# Altium PCB PowerBoardPCB.PcbDoc
Units mm, origin at the board's own origin, x right, y up, seen from the top; angles counter-clockwise.
Board outline 55 x 50 mm, 2 copper layers (Top Layer, Bottom Layer); 20 components, 22 nets, 92 pads, 1 vias.
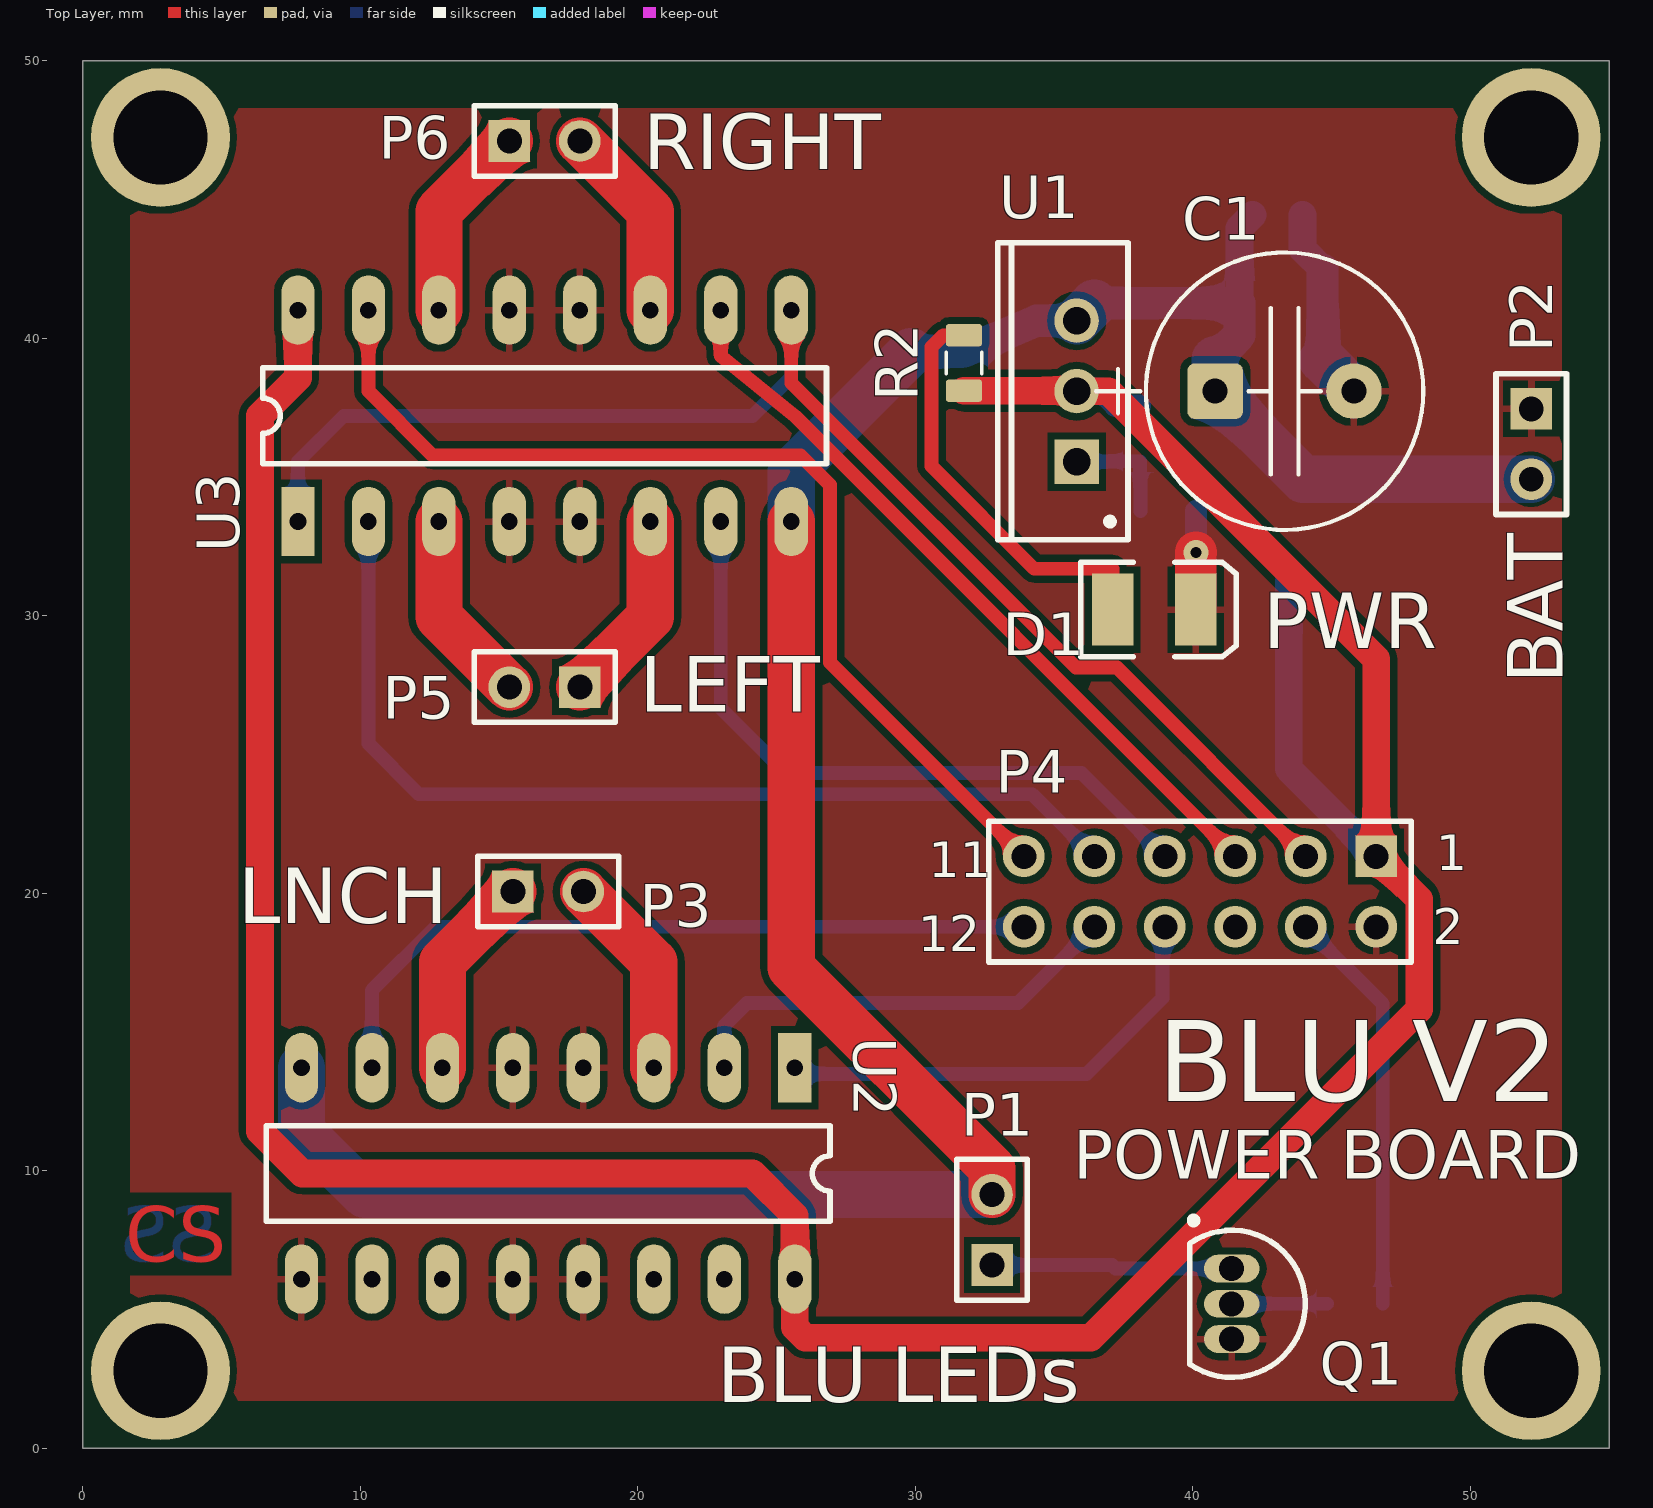
[diagram p0: Top Layer view]
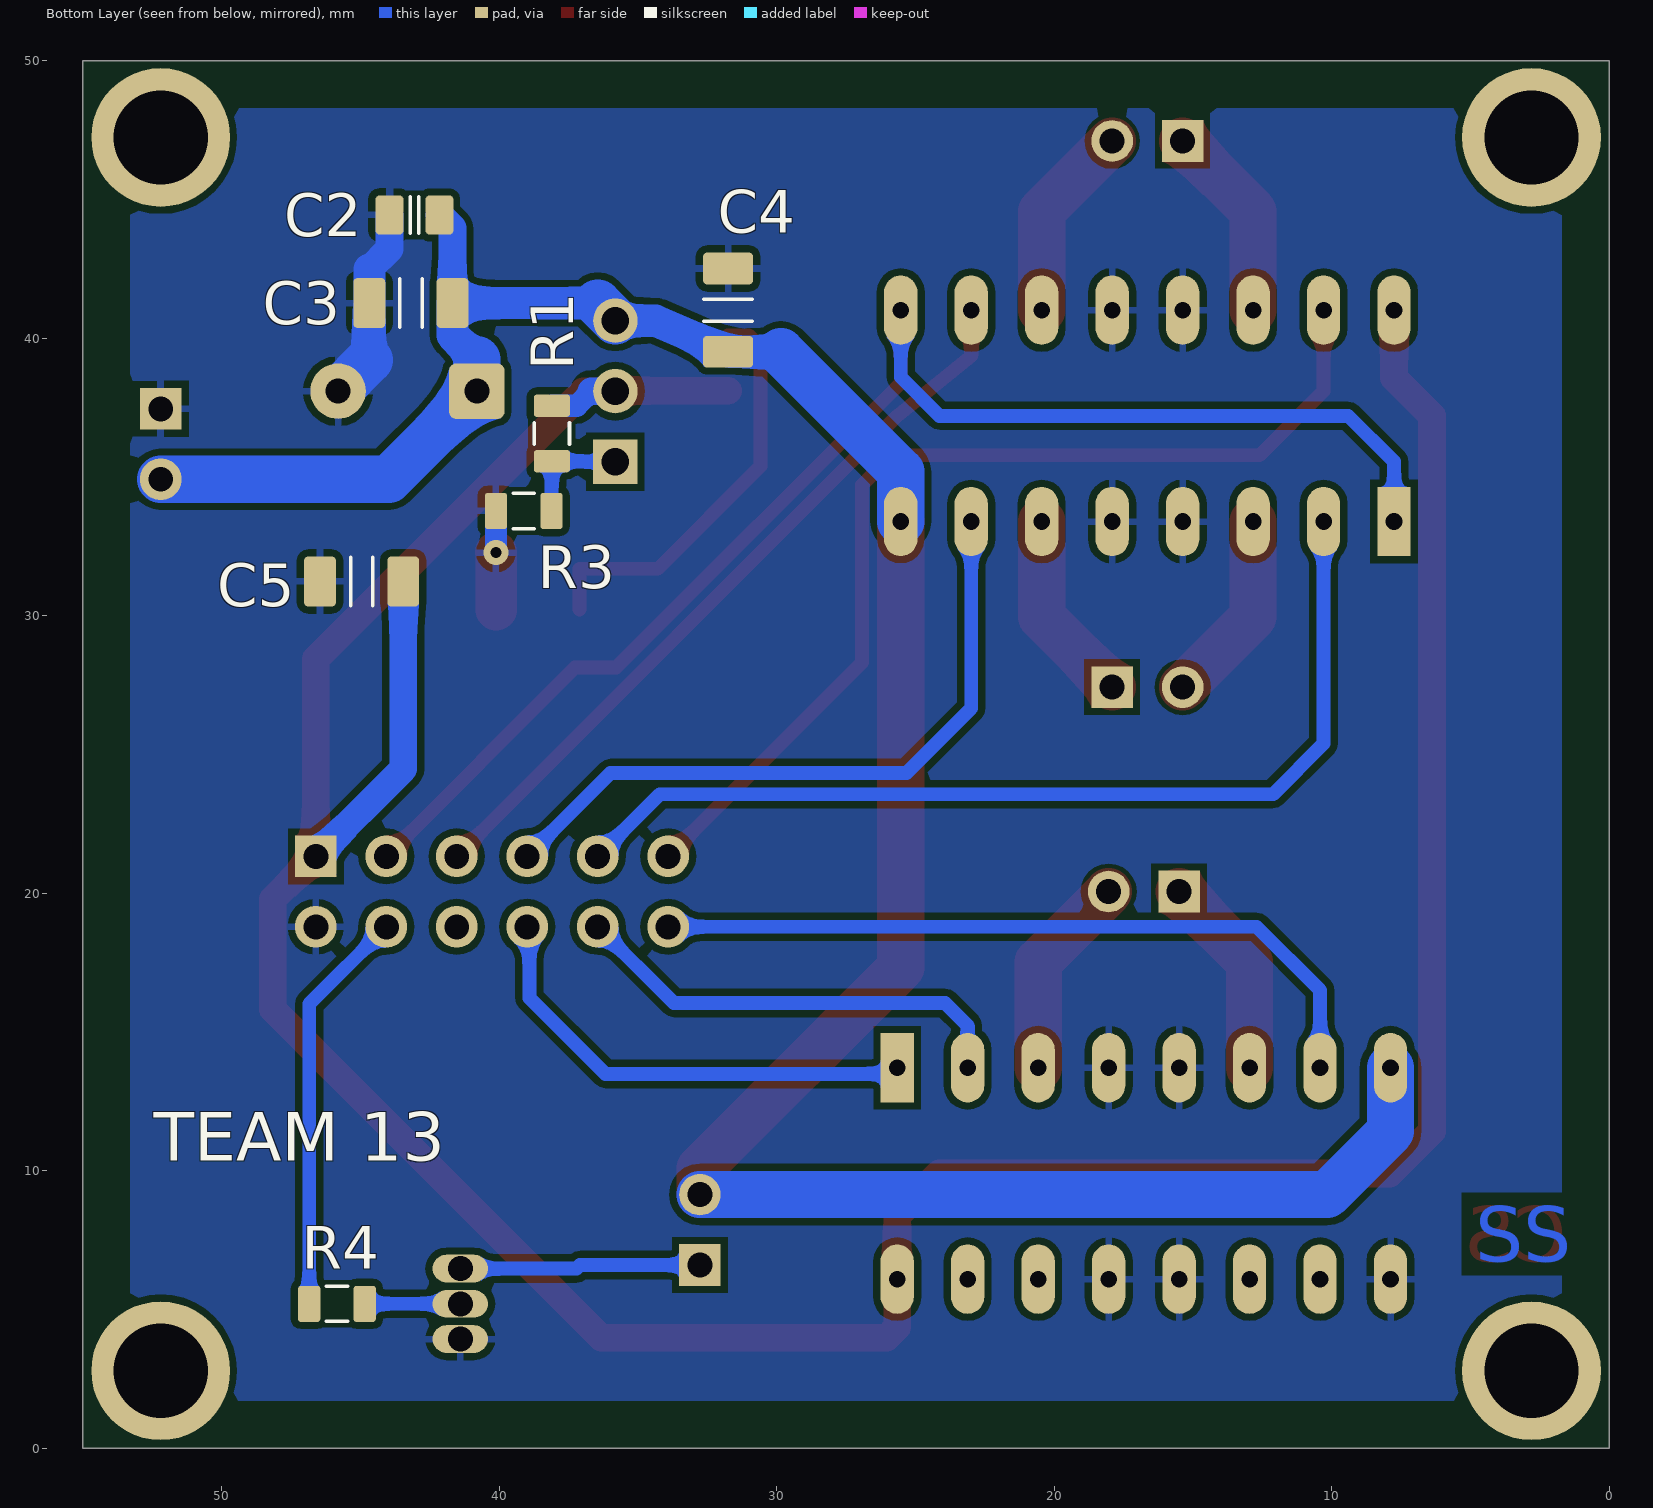
[diagram p1: Bottom Layer view, seen from below]

## Layer stack, top to bottom
Top Solder: solder mask 0.0102, Solder Resist, Dk 3.5
Top Layer: signal copper 0.0356
Dielectric 1: dielectric 0.32, FR-4, Dk 4.8
Bottom Layer: signal copper 0.0356
Bottom Solder: solder mask 0.0102, Solder Resist, Dk 3.5

## Board outline
0,0 55,0 55,50 0,50

## Design rules (kind name [scope] priority, off if disabled: settings)
Clearance [All] p1: gap=0.25
PolygonConnect [All] p1: connectstyle=Relief reliefconductorwidth=0.254 reliefentries=4 polygonreliefangle="90 Angle" airgapwidth=0.254
RoutingVias [All] p1: holewidth=0.4 width=0.9 viastyle="Through Hole" minholewidth=0.711 minwidth=1.27 maxholewidth=0.711 maxwidth=1.27
SMDNeckDown [All] p1: percent=100.000
SolderMaskExpansion [All] p1: expansion=0.102
Width Width_Motors [(InNet('NetP3_1') OR InNet('NetP3_2') OR InNet('NetP5_1') OR InNet('NetP5_2') OR InNet('NetP6_1') OR InNet('NetP6_2'))] p1: maxlimit=2 minlimit=1.5 preferedwidth=1.7 minimp=50.000000 maximp=50.000000 favimp=50.000000
Width Width_Power [(InNet('VBAT')OR InNet('GND'))] p2: maxlimit=2 minlimit=1.5 preferedwidth=1.7 minimp=50.000000 maximp=50.000000 favimp=50.000000
Width Width_5V [InNet('5VPB')] p3: maxlimit=1.5 minlimit=0.8 preferedwidth=1 minimp=50.000000 maximp=50.000000 favimp=50.000000
Width [All] p4: maxlimit=1.5 minlimit=0.3 preferedwidth=0.5 minimp=50.000000 maximp=50.000000 favimp=50.000000
30 further rules are at their usual default settings.

## Components (designator, comment, footprint, x,y, rotation, side; value= is the part's Value field where it differs from the comment)
C1 "1000µ" CAPE5.0mm 43.307,38.1 r0 top
C2 "approved sub OK" CAPC2012X135N 43.053,44.45 r0 bottom
C3 "approved sub OK" CAPC3216X180N 43.18,41.275 r0 bottom
C4 "approved sub OK" CAPC3216X180N 31.75,41.021 r90 bottom
C5 "approved sub OK" CAPC3216X180N 44.958,31.242 r0 bottom
D1 "PWRLED" 3.5X2.8X1.9 38.608,30.226 r0 top
P1 "BLU_LED_HEADER" HDR1X2 32.766,6.604 r90 top
P2 "V_BAT" HDR1X2 52.197,37.465 r270 top
P3 "LNCH_MOTOR_CONNECTOR" HDR1X2 15.494,20.066 r0 top
P4 "POWERBOARD_HEADER" HDR2X6 46.609,21.336 r180 top
P5 "LEFT_MOTOR_CONNECTOR" HDR1X2 17.907,27.432 r180 top
P6 "RIGHT_MOTOR_CONNECTOR" HDR1X2 15.367,47.117 r0 top
Q1 "NPN" TO-226-AA 41.402,5.207 r180 top
R1 "3K9" RESC2012X70N 38.1,36.576 r270 bottom
R2 "330" RESC2012X70N 31.75,39.116 r90 top
R3 "10K" RESC2012X70N 39.116,33.782 r0 bottom
R4 "10K" RESC2012N_ZERO 45.847,5.207 r0 bottom
U1 "LM317AT/NOPB" T03B 35.814,38.1 r90 top
U2 "L293DNE Motor Driver" "DIP16 (NE)" 25.654,13.716 r270 top
U3 "L293DNE Motor Driver" "DIP16 (NE)" 7.747,33.401 r90 top

## Footprints (in the part's own frame and the unit in brackets; to place one, negate y for a bottom-side part, rotate by r counter-clockwise, add the part's x,y. Pads: shape width x height; smd on the part's side, far side on the other; paste and mask are expansions set on the pad)
3.5X2.8X1.9 [mm] "SM LED; 2 C-Bend Leads; Body 3.5 x 2.8 x 1.9 mm, inc leads (LxWxH typ)"
  rect 1.5x2.6 smd: 1(-1.5,0) 2(1.5,0)
  silkscreen extent -2.65,-1.7 2.95,1.7
CAPC2012X135N [mm] "Chip Capacitor, Body 2.0x1.2mm, EIA 0805, IPC Medium Density"
  round 0.254 on Mech15: 0(0,0)
  rrect25% 1x1.4 smd: 1(-0.9,0) 2(0.9,0)
  Top Layer pour cut-out: -0.675,0.7 -0.475,0.9 0.475,0.9 0.675,0.7 0.675,-0.7 0.475,-0.9 -0.475,-0.9 -0.675,-0.7
  silkscreen extent -0.15,-0.65 0.15,0.65, body extent -1.1,-0.72 1.1,0.73, height 1.34
CAPC3216X180N [mm] "Chip Capacitor, Body 3.2x1.6mm, 1.8mm H, EIA 1206, IPC Medium Density"
  round 0.508 on Mech15: 0(0,0)
  rrect25% 1.15x1.8 smd: 1(-1.5,0) 2(1.5,0)
  silkscreen extent -0.4,-0.88 0.4,0.88, body extent -1.7,-0.9 1.7,0.9, height 1.8
CAPE5.0mm [mm]
  rrect25% 2x2 hole 0.9: 1(-2.5,0)
  round 2 hole 0.9: 2(2.5,0)
  silkscreen extent -6.8,-5 5,5, body extent -4.96,-4.97 4.95,4.96, height 20
"DIP16 (NE)" [mm]
  rect 2.5x1.2 hole 0.6: 1(0,0)
  oval 2.5x1.2 hole 0.6: 2(0,-2.54) 3(0,-5.08) 4(0,-7.62) 5(0,-10.16) 6(0,-12.7) 7(0,-15.24) 8(0,-17.78) 9(7.62,-17.78) 10(7.62,-15.24) 11(7.62,-12.7) 12(7.62,-10.16) 13(7.62,-7.62) 14(7.62,-5.08) 15(7.62,-2.54) 16(7.62,0)
  silkscreen extent 2.08,-19.05 5.54,1.27
HDR1X2 [mm] "Connector; Header; 2 Position"
  rect 1.5x1.5 hole 0.9: 1(0,0)
  round 1.5 hole 0.9: 2(2.54,0)
  silkscreen extent -1.27,-1.27 3.81,1.27
HDR2X6 [mm] "Connector; Header; 6x2 Position"
  rect 1.5x1.5 hole 0.9: 1(0,0)
  round 1.5 hole 0.9: 2(0,2.54) 3(2.54,0) 4(2.54,2.54) 5(5.08,0) 6(5.08,2.54) 7(7.62,0) 8(7.62,2.54) 9(10.16,0) 10(10.16,2.54) 11(12.7,0) 12(12.7,2.54)
  silkscreen extent -1.27,-1.27 13.97,3.81
RESC2012N_ZERO [mm] "Chip Resistor, Body 2.0x1.2mm, 0805, IPC Medium Density"
  round 0.254 on Mech15: 0(0,0)
  rrect25% 0.8x1.3 smd: 1(-1,0) 2(1,0)
  Top Layer pour cut-out: -0.725,0.65 -0.525,0.85 0.525,0.85 0.725,0.65 0.725,-0.65 0.525,-0.85 -0.525,-0.85 -0.725,-0.65
  silkscreen extent -0.38,-0.64 0.38,0.64, body extent -1.1,-0.67 1.1,0.68, height 0.69
RESC2012X70N [mm] "Chip Resistor, Body 2.0x1.2mm, EIA 0805, IPC Medium Density"
  round 0.254 on Mech15: 0(0,0)
  rrect25% 0.8x1.3 smd: 1(-1,0) 2(1,0)
  Top Layer pour cut-out: -0.725,0.65 -0.525,0.85 0.525,0.85 0.725,0.65 0.725,-0.65 0.525,-0.85 -0.525,-0.85 -0.725,-0.65
  silkscreen extent -0.38,-0.64 0.38,0.64, body extent -1.1,-0.67 1.1,0.68, height 0.69
T03B [mm] "TO, Thru-Hole, Vertical, Heatsink Mounted; 3 In-Line Leads; Pitch 2.54 mm"
  rect 1.6x1.6 hole 1: 1(-2.54,0)
  round 1.6 hole 1: 2(0,0) 3(2.54,0)
  silkscreen extent -5.35,-1.85 5.35,2.85, body extent -5.4,-1.9 5.4,2.9, height 19.8
TO-226-AA [mm] "TO, Flat Index; 3 In-Line, Axial Leads; Body Dia. 4.8mm; Leads 0.55 x 0.51 mm (max)"
  oval 2x1 hole 0.9: 1(0,-1.27) 2(0,0) 3(0,1.27)
  silkscreen extent -2.65,-3.13 1.52,2.65, body extent -2.66,-2.66 1.52,2.66, height 5.33

## Part data
C1: library part CAPE_33u_200V_THT, "Capacitor THT Alum Elec 33uF 20% 200V"
C2: library part CAPC_1n8_50V_0805, "Capacitor SMD Cer 1.8nF 10% 50V X7R 0805"
C3 C4 C5: library part CAPC_10u_1206_16V, "Capacitor SMD Cer 10uF 10% 16V X7R 1206"
D1: library part LED3, "Typical BLUE SiC LED"
P1 P2 P3 P5 P6: library part "Header 2", "Header, 2-Pin"
P4: library part "Header 6X2", "Header, 6-Pin, Dual row"
Q1: "NPN Bipolar Transistor"
R1 R2 R3: library part RES_10K_0805_5%, "Resistor SMD chip 10k Ohm 0.125W 5% 0805"
R4: library part RES_0R_0805, "Resistor SMD chip 0.0 Ohm 0.125W 0805"
U1: library part CMP-0062-02452-1, "3-Terminal Adjustable Regulator, 3-pin TO-220, Pb-Free"
U2 U3: library part L293DNE, "TI L293DNE Quad H-bridge Motor Driver"

## Free pads (board coordinates)
  round 5 hole 3.4: 0(2.794,2.794) 0(2.794,47.244) 0(52.197,2.794) 0(52.197,47.244)

## Via types
v1: diameter 0.9, hole 0.4, Top Layer to Bottom Layer, 1 vias

## Nets (pads, with @x,y where several pads share a name; then routed paths per layer and width w, separated by ;. In a path a pad name is that pad's centre, name@x,y a point inside that pad or via, vN(x,y) a via of type N, cw(c..) or ccw(c..) an arc to the next point about the centre after c; other vN are vias at no path point)
5VPB: C5.1 P4.1 R1.1 R2.1 U1.2 U2.16 U3.16 | length 128.1
  Top Layer w1: U3.16 7.747,38.583 6.375,37.211 6.375,11.43 7.899,9.906 24.13,9.906 25.654,8.382 U2.16 25.654,4.369 26.035,3.988 36.322,3.988 48.158,15.824 48.158,19.787 P4.1 46.609,28.448 36.957,38.1 U1.2 35.798,38.116 R2.1
  Bottom Layer w0.8: 36.678,38.1 37.202,37.576 R1.1
  Bottom Layer w1: U1.2 36.678,38.1 ; C5.1 43.458,24.487 P4.1
GND: C1.2 C2.2 C3.2 C4.2 C5.2 D1.2 P2.1 P4.2 Q1.3 R3.2 U2.4 U2.5 U2.9 U2.12 U2.13 U3.4 U3.5 U3.12 U3.13 | length 10.7
  Top Layer w1.5: D1.2 40.108,32.275 v1(40.116,32.283)
  Bottom Layer w0.8: v1(40.116,32.283) R3.2
  Bottom Layer w1: C2.2 43.953,43.221 44.68,42.494
  Bottom Layer w1.15: 44.68,39.227 C3.2 44.68,42.494
  Bottom Layer w1.7: 44.68,39.227 C1.2
LNCHEN: P4.8 U2.1 | length 17.3
  Bottom Layer w0.5: U2.1 25.654,13.492 36.175,13.492 38.913,16.231 38.913,18.796 P4.8
LNCHSIG_F: P4.10 U2.2 | length 16.3
  Bottom Layer w0.5: U2.2 23.114,15.24 23.927,16.053 33.706,16.053 P4.10
LNCHSIG_R: P4.12 U2.7 | length 27.2
  Bottom Layer w0.5: U2.7 10.414,16.51 12.7,18.796 P4.12
MTREN: P4.3 U3.1 U3.9 | length 51.8
  Top Layer w0.5: U3.9 25.527,38.399 35.783,28.143 37.262,28.143 P4.3
  Bottom Layer w0.5: U3.1 7.747,35.56 9.398,37.211 24.13,37.211 25.527,38.608 U3.9
MTRSIG_LF: P4.9 U3.2 | length 35.8
  Bottom Layer w0.5: U3.2 10.287,25.4 12.116,23.571 34.214,23.571 P4.9
MTRSIG_LR: P4.7 U3.7 | length 24.9
  Bottom Layer w0.5: U3.7 22.987,26.67 25.324,24.333 35.992,24.333 P4.7
MTRSIG_RF: P4.11 U3.15 | length 37.2
  Top Layer w0.5: U3.15 10.287,38.1 12.598,35.789 25.857,35.789 26.924,34.722 26.924,28.321 P4.11
MTRSIG_RR: P4.5 U3.10 | length 27.5
  Top Layer w0.5: U3.10 22.987,39.37 25.654,37.211 P4.5
NetD1_1: D1.1 R2.2 | length 15.2
  Top Layer w0.5: R2.2 31.01,40.116 30.582,39.688 30.582,35.401 34.283,31.699 37.108,31.699 D1.1
NetP1_1: P1.1 Q1.1 | length 8.7
  Bottom Layer w0.5: P1.1 37.084,6.604 37.211,6.477 Q1.1
NetP3_1: P3.1 U2.6 | length 7.4
  Top Layer w1.7: U2.6 12.954,17.526 P3.1
NetP3_2: P3.2 U2.3 | length 7.4
  Top Layer w1.7: P3.2 20.574,17.526 U2.3
NetP4_4: P4.4 R4.2 | length 14.7
  Bottom Layer w0.5: P4.4 46.847,16.018 R4.2
NetP5_1: P5.1 U3.6 | length 7
  Top Layer w1.7: P5.1 20.447,29.972 U3.6
NetP5_2: P5.2 U3.3 | length 7
  Top Layer w1.7: U3.3 12.827,29.972 P5.2
NetP6_1: P6.1 U3.14 | length 7.1
  Top Layer w1.7: U3.14 12.827,44.577 P6.1
NetP6_2: P6.2 U3.11 | length 7.1
  Top Layer w1.7: P6.2 20.447,44.577 U3.11
NetQ1_2: Q1.2 R4.1 | length 3.4
  Bottom Layer w0.5: Q1.2 R4.1
NetR1_2: R1.2 R3.1 U1.1 | length 4.1
  Bottom Layer w0.5: U1.1 36.932,35.56 36.948,35.576 R1.2 38.1,34.687 38.116,34.671 R3.1
VBAT: C1.1 C2.1 C3.1 C4.1 P1.2 P2.2 U1.3 U2.8 U3.8 | length 95.2
  Top Layer w1.7: U3.8 25.527,17.323 32.766,10.084 P1.2
  Bottom Layer w1: C3.1 41.68,43.977 C2.1
  Bottom Layer w1.15: 29.845,39.521 C4.1 34.368,40.64 U1.3 ; 36.449,41.275 C3.1 41.68,40.116 40.807,39.243
  Bottom Layer w1.7: U2.8 7.874,11.43 10.16,9.144 P1.2 ; U3.8 25.527,35.203 29.845,39.521 ; U1.3 36.449,41.275 ; 40.807,39.243 C1.1 43.982,34.925 P2.2
pads on no net: C2.0 C3.0 C4.0 C5.0 P4.6 R1.0 R2.0 R3.0 R4.0 U2.10 U2.11 U2.14 U2.15

## Polygon pours and split planes (outlines as drawn)
GND on Top Layer "Top Layer-GND" (solid, pour order 6): 1.3,48.7 53.7,48.7 53.7,1.3 1.3,1.3
GND on Bottom Layer "Bottom Layer-GND" (solid, pour order 5): 1.3,48.7 53.7,48.7 53.7,1.3 1.3,1.3

## Other copper
Top Layer:
  text "CS" at 1.524,6.731 h2
Bottom Layer:
  text "SS" at 4.826,6.731 h2

## Silkscreen, mask and mechanical layers (free items; w line width, h text height)
Top Overlay:
  text "RIGHT" at 20.193,46.101 h2
  text "PWR" at 42.545,28.829 h2
  text "BAT" at 53.34,27.559 h2 r90
  text "LEFT" at 20.066,26.543 h2
  text "LNCH" at 5.588,18.923 h2
  text "BLU V2" at 38.735,11.557 h5
  text "POWER BOARD" at 35.687,9.144 h3
  text "BLU LEDs" at 22.86,1.651 h2
Bottom Overlay:
  text "TEAM 13" at 52.451,9.779 h3
Mechanical 1:
  the board outline again, w0.3
Drill Drawing:
  text ".LEGEND" at 60.08,5.08 h1.52
  text "Drill Drawing." at 60.08,2.54 h1.52

## Dimensions
0,0 to 0,50 on Mechanical 1
0,0 to 55,0 on Mechanical 1

## Text inside footprints (layer, text, board x,y; h text height)
P4: Top Overlay "12" at 30.099,17.907 h1.27; Top Overlay "1" at 30.48,20.574 h1.27; Top Overlay "1" at 31.623,20.574 h1.27; Top Overlay "1" at 48.768,20.828 h1.27; Top Overlay "2" at 48.641,18.161 h1.27